# Altium PCB 447PCB.PcbDoc
Units mm, origin at the board's own origin, x right, y up, seen from the top; angles counter-clockwise.
Board outline 100 x 100 mm, 2 copper layers (Top Layer, Bottom Layer); 5 components, 25 nets, 62 pads, 0 vias.
Unrouted connection lines stored in the file: 1.
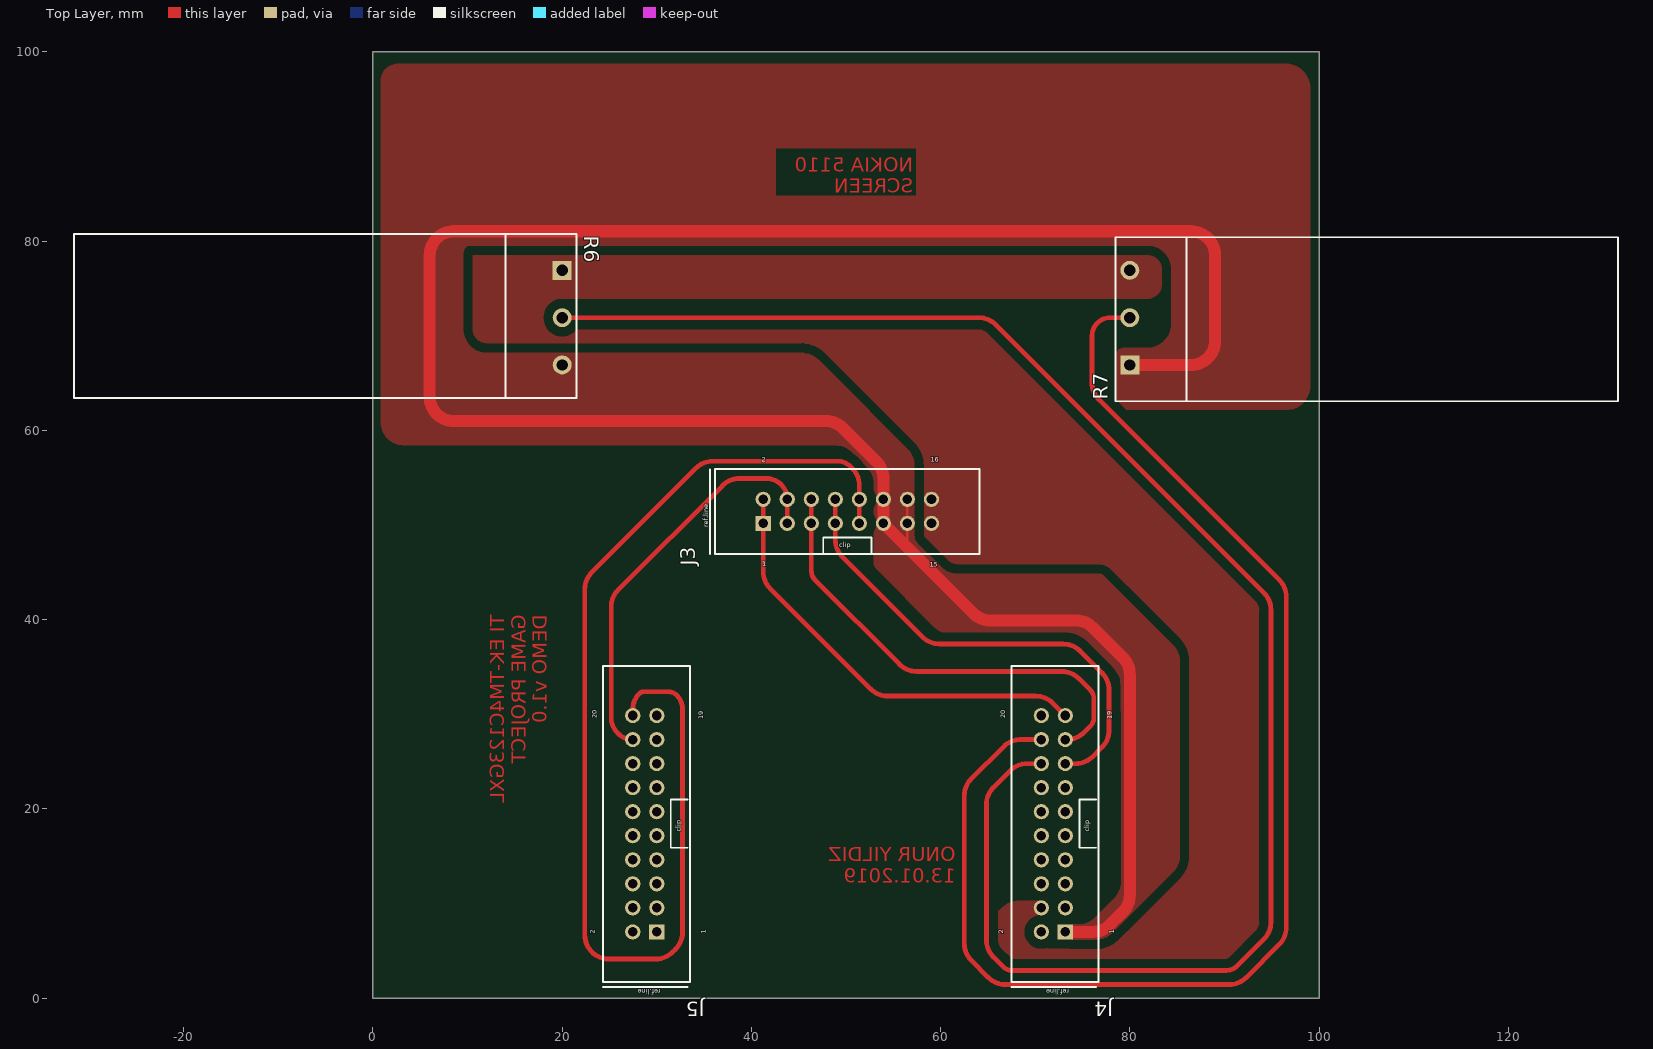
[diagram p0: Top Layer view]
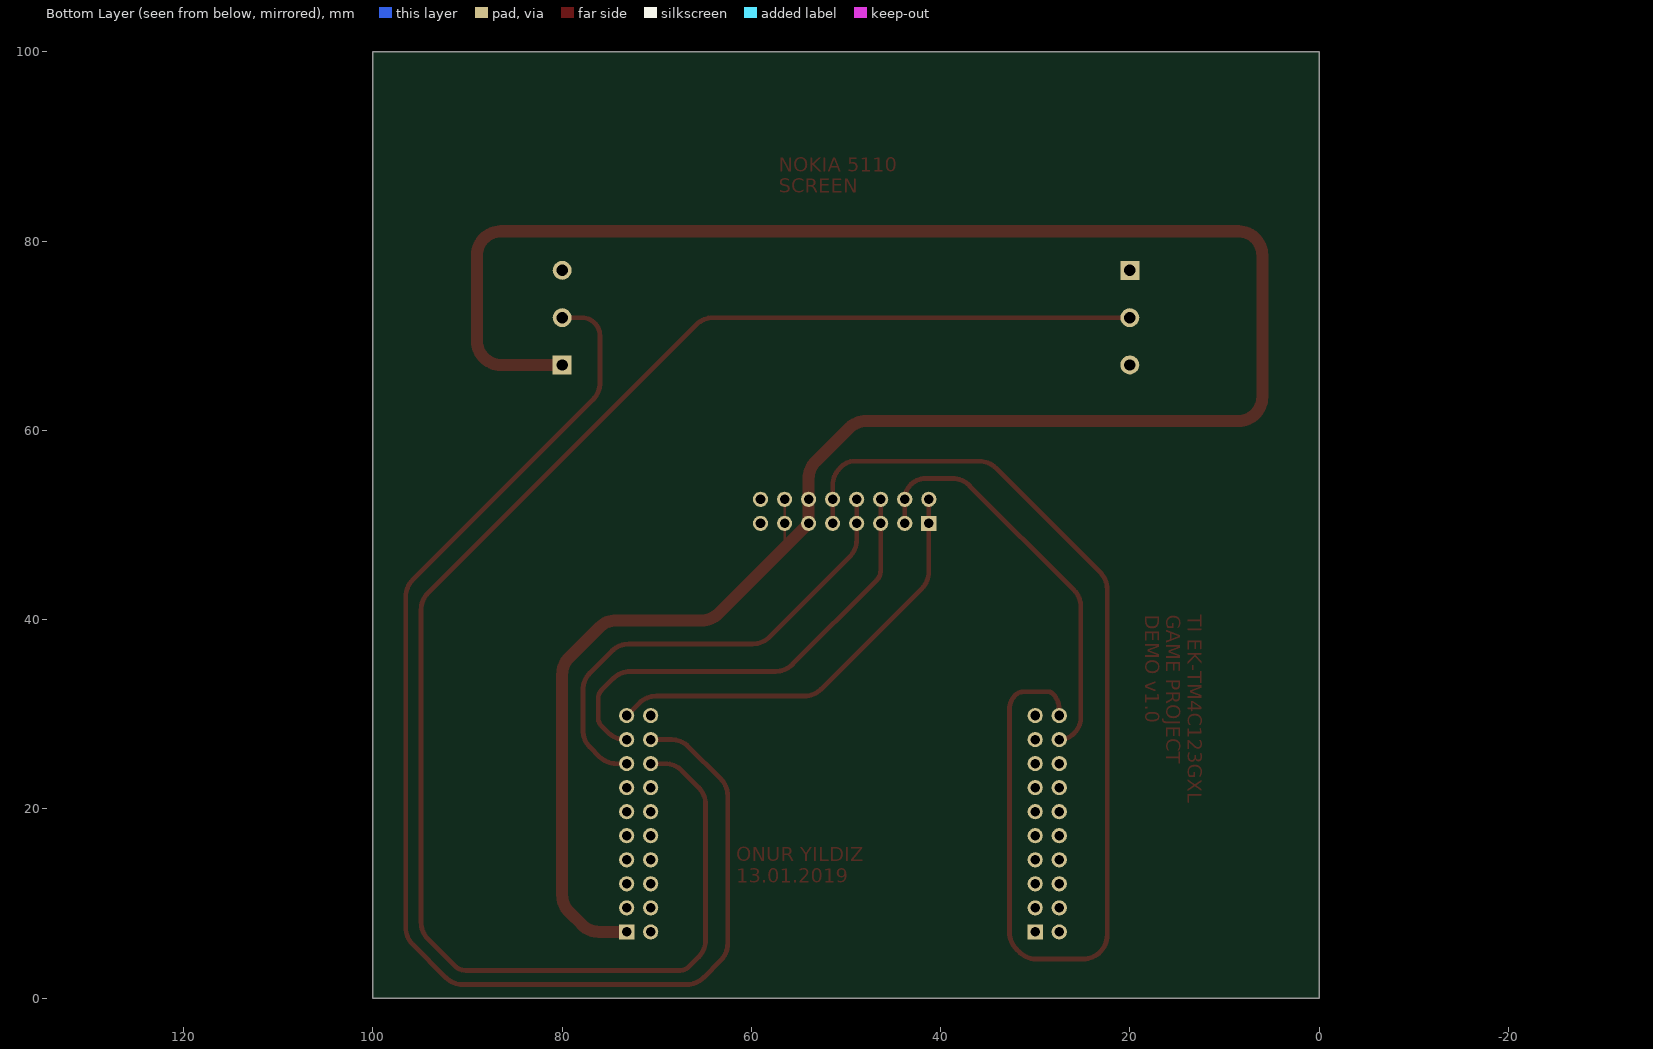
[diagram p1: Bottom Layer view, seen from below]
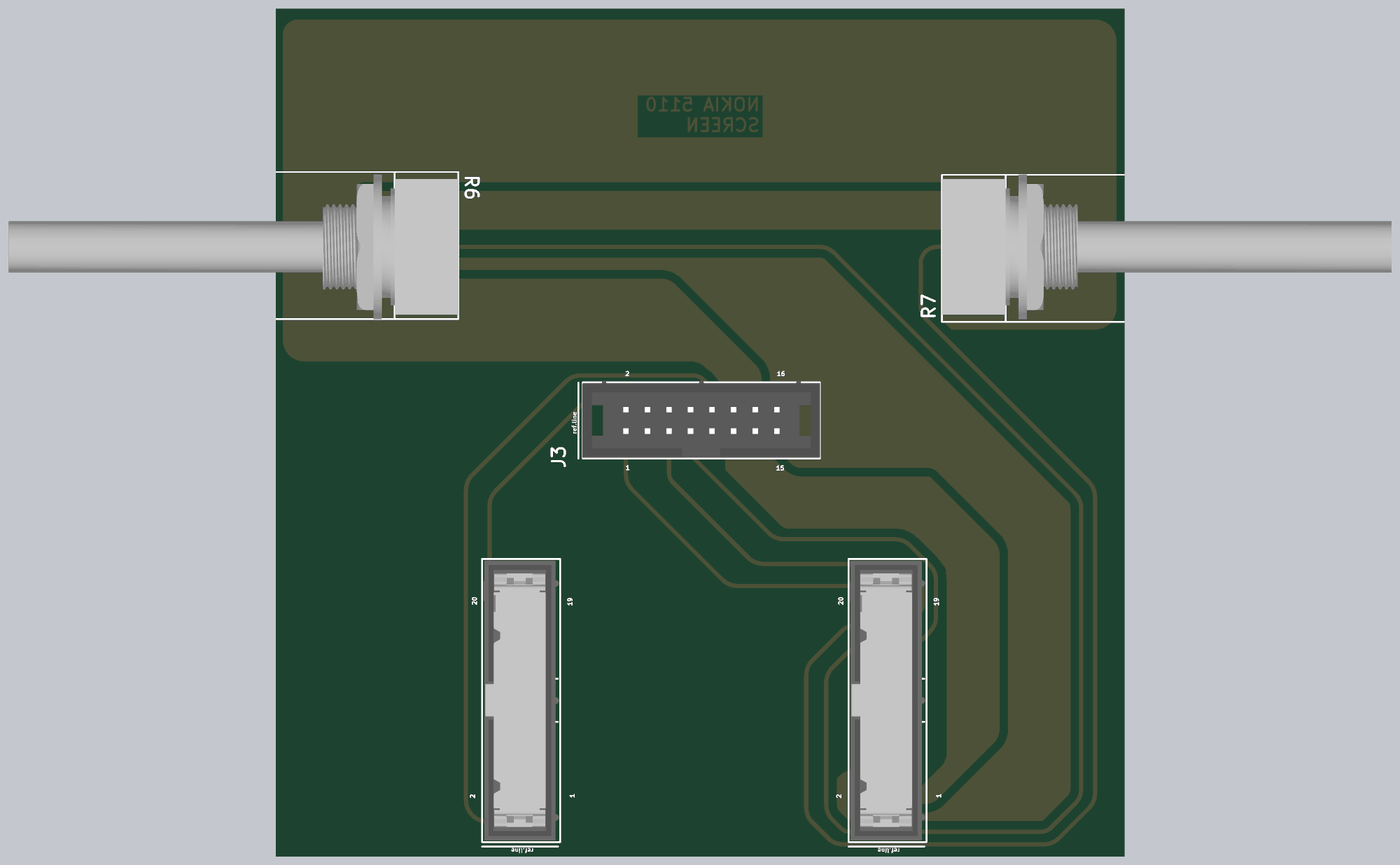
[diagram p2: 3D render of the assembled board from above, using the file's embedded part models]

## Layer stack, top to bottom
Top Solder: solder mask 0.0102, Solder Resist, Dk 3.5
Top Layer: signal copper 0.0356
Dielectric 1: dielectric 0.32, FR-4, Dk 4.8
Bottom Layer: signal copper 0.0356
Bottom Solder: solder mask 0.0102, Solder Resist, Dk 3.5

## Board outline
0,0 0,100 100,100 100,0

## Design rules (kind name [scope] priority, off if disabled: settings)
Clearance [All] p1: gap=0.254 except(1: Arc-Fill Arc-Poly Arc-Region Track-Fill Track-Poly Track-Region SMDPad-Fill SMDPad-Poly SMDPad-Region THPad-Fill THPad-Poly THPad-Region Via-Fill Via-Poly Via-Region Fill-Fill Fill-Poly Fill-Region Poly-Poly Poly-Region Region-Region)
PlaneConnect [All] p1: planeconnectstyle=Direct reliefexpansion=0.508 reliefentries=4 reliefconductorwidth=0.254 reliefairgap=0.254
PolygonConnect [All] p1: connectstyle=Direct reliefconductorwidth=0.254 reliefentries=4 polygonreliefangle="90 Angle" airgapwidth=0.254
RoomDefinition 447Schematic [InComponentClass('447Schematic')] p1: confinementstyle=ConfineIn formatcopy=TRUE lockcomponents=FALSE outline -45,-8.08 152.5,-8.08 152.5,101.92 -45,101.92
RoutingVias [All] p1: holewidth=0.711 width=1.27 viastyle="Through Hole" minholewidth=0.711 minwidth=1.27 maxholewidth=0.711 maxwidth=1.27
SolderMaskExpansion [All] p1: expansion=0.102
Width [All] p1: maxlimit=1.27 minlimit=0.254 preferedwidth=0.254 minimp=50.000000 maximp=50.000000 favimp=50.000000
29 further rules are at their usual default settings.

## Components (designator, comment, footprint, x,y, rotation, side; value= is the part's Value field where it differs from the comment)
J3 "IDC 16" IDC16 41.25,50.18 r90 top locked
J4 "IDC 20" IDC20 73.18,7 r180 top locked
J5 "IDC 20" IDC20 30,7 r180 top locked
R6 "10K-POT_CP16SH10IP06103" "POT (5mmPitch)" 20,71.92 r270 top
R7 "10K-POT_CP16SH10IP06103" "POT (5mmPitch)" 80,71.92 r90 top

## Footprints (in the part's own frame and the unit in brackets; to place one, negate y for a bottom-side part, rotate by r counter-clockwise, add the part's x,y. Pads: shape width x height; smd on the part's side, far side on the other; paste and mask are expansions set on the pad)
IDC16 [mm]
  rect 1.6x1.6 hole 1.02: 1(0,0)
  round 1.6 hole 1.02: 2(2.54,0) 3(0,-2.54) 4(2.54,-2.54) 5(0,-5.08) 6(2.54,-5.08) 7(0,-7.62) 8(2.54,-7.62) 9(0,-10.16) 10(2.54,-10.16) 11(0,-12.7) 12(2.54,-12.7) 13(0,-15.24) 14(2.54,-15.24) 15(0,-17.78) 16(2.54,-17.78)
  silkscreen extent -3.24,-22.86 5.76,5.61, body extent -3.13,-22.89 5.97,5.11, height 9.3
IDC20 [mm]
  rect 1.6x1.6 hole 1.02: 1(0,0)
  round 1.6 hole 1.02: 2(2.54,0) 3(0,-2.54) 4(2.54,-2.54) 5(0,-5.08) 6(2.54,-5.08) 7(0,-7.62) 8(2.54,-7.62) 9(0,-10.16) 10(2.54,-10.16) 11(0,-12.7) 12(2.54,-12.7) 13(0,-15.24) 14(2.54,-15.24) 15(0,-17.78) 16(2.54,-17.78) 17(0,-20.32) 18(2.54,-20.32) 19(0,-22.86) 20(2.54,-22.86)
  silkscreen extent -3.5,-28.1 5.7,5.82, body extent -3.35,-27.9 5.5,5.1, height 14.61
"POT (5mmPitch)" [mm] "POT (5mmPitch with 1.1mm pin sizes)"
  rect 2x2 hole 1.2: 1(-5,0)
  round 2 hole 1.2: 2(0,0) 3(5,0)
  silkscreen extent -8.84,-51.6 8.5,1.5, body extent -8.6,-51.5 8.6,1.5, height 21.11

## Part data
J3: library part 3020-16-0100-00, "IDC BOX HEADER .100\" 16POS"
J4 J5: library part 3020-20-0100-00, "IDC BOX HEADER .100\" 20POS"
R6 R7: library part CP16SH10IP06103, "POT 10K OHM 1/5W CARBON LINEAR"

## Nets (pads, with @x,y where several pads share a name; then routed paths per layer and width w, separated by ;. In a path a pad name is that pad's centre, name@x,y a point inside that pad or via, vN(x,y) a via of type N, cw(c..) or ccw(c..) an arc to the next point about the centre after c; other vN are vias at no path point)
3.3V: J3.11 J3.12 J3.13 J3.14 J4.1 R6.3 R7.1 | length 247.6
  Top Layer w0.254: 56.49,47.64 J3.13 J3.14
  Top Layer w1.27: J4.1 76.098,7 ccw(c76.098,9.54) 77.894,7.744 79.256,9.106 ccw(c77.46,10.902) 80,10.902 80,34.198 ccw(c77.46,34.198) 79.256,35.994 76.074,39.176 ccw(c74.278,37.38) 74.278,39.92 65.262,39.92 cw(c65.262,42.46) 63.466,40.664 56.49,47.64 J3.11 J3.12 53.95,54.918 ccw(c51.41,54.918) 53.206,56.714 49.664,60.256 ccw(c47.868,58.46) 47.868,61 8.54,61 cw(c8.54,63.54) 6,63.54 6,78.51 cw(c8.54,78.51) 8.54,81.05 86.46,81.05 cw(c86.46,78.51) 89,78.51 89,69.46 cw(c86.46,69.46) 86.46,66.92 R7.1
GND: J3.15 J3.16 J4.4 J5.2 R6.1 R7.3
NetC1_1: 
NetC1_2: 
NetC2_1: 
NetC3_2: 
NetC4_1: 
NetC4_2: 
NetD1_K: 
NetD2_A: 
NetD3_2: 
NetD6_A1: 
NetD7_A: 
NetD8_2: 
NetJ1_2: 
NetJ1_3: 
NetJ1_5: 
NetJ1_6: 
NetJ3_1: J3.1 J3.2 J4.19 | length 46.2
  Top Layer w0.5: J3.2 J3.1 41.25,45.077 ccw(c43.79,45.077) 41.994,43.281 52.611,32.664 ccw(c54.407,34.46) 54.407,31.92 70.068,31.92 cw(c70.068,29.38) 71.864,31.176 J4.19
NetJ3_3: J3.3 J3.4 J5.18 | length 43.7
  Top Layer w0.5: J5.18 cw(c27.46,29.505) 25.915,27.96 25.875,28 cw(c27.565,29.69) 25.177,29.603 cw(c27.565,29.69) 25.175,29.69 25.175,41.348 cw(c27.715,41.348) 25.919,43.144 36.951,54.176 cw(c38.747,52.38) 38.747,54.92 41.59,54.92 cw(c41.59,52.72) J3.4 J3.3
NetJ3_5: J3.5 J3.6 J4.17 | length 49.5
  Top Layer w0.5: J3.6 J3.5 46.33,45.224 ccw(c47.849,45.224) 46.775,44.15 55.656,35.269 ccw(c57.452,37.065) 56.092,34.92 ccw(c57.452,37.065) 57.452,34.525 72.798,34.525 cw(c72.798,31.985) 74.594,33.781 75.846,32.529 cw(c74.993,31.675) 76.2,31.675 76.2,29.611 cw(c75.014,29.611) 76,28.952 cw(c75.014,29.611) 75.853,28.773 75.144,28.064 cw(c73.348,29.86) 73.348,27.32 J4.17
NetJ3_7: J3.7 J3.8 J4.15 | length 51.3
  Top Layer w0.5: J3.8 J3.7 48.87,48.432 ccw(c51.41,48.432) 49.614,46.636 58.081,38.169 ccw(c59.877,39.965) 58.371,37.92 ccw(c59.877,39.965) 59.877,37.425 72.948,37.425 cw(c72.948,34.885) 74.744,36.681 77.056,34.369 cw(c75.26,32.573) 77.8,32.573 77.8,28.302 cw(c75.26,28.302) 77.056,26.506 76.074,25.524 cw(c74.278,27.32) 74.278,24.78 J4.15
NetJ3_9: J3.9 J3.10 J5.20 | length 122.2
  Top Layer w0.5: J5.20 27.46,30.509 cw(c29.816,30.509) 28.15,32.175 cw(c28.633,31.692) 28.633,32.375 31.255,32.375 cw(c31.255,31.18) 32.1,32.025 cw(c30.591,30.516) 32.725,30.516 32.725,6.977 cw(c30.185,6.977) 31.981,5.181 31.625,4.825 cw(c29.935,6.515) 29.935,4.125 24.94,4.125 cw(c24.94,6.665) 22.4,6.665 22.4,43.223 cw(c24.94,43.223) 23.144,45.019 34.131,56.006 cw(c35.927,54.21) 35.927,56.75 49.122,56.75 cw(c49.122,54.872) 50.45,56.2 50.666,55.984 cw(c48.87,54.188) 51.41,54.188 J3.10 J3.9
NetJ4_16: J4.16 R6.2 | length 177.8
  Top Layer w0.5: R6.2 64.028,71.92 cw(c64.028,69.38) 65.824,71.176 94.169,42.831 cw(c92.373,41.035) 94.913,41.035 94.913,8.015 cw(c92.373,8.015) 94.169,6.219 91.375,3.425 cw(c90.156,4.644) 90.156,2.92 67.552,2.92 cw(c67.552,4.252) 66.61,3.31 65.594,4.326 cw(c67.39,6.122) 65,5.262 cw(c67.39,6.122) 64.85,6.122 64.85,20.498 cw(c67.39,20.498) 65,21.358 cw(c67.39,20.498) 65.594,22.294 67.336,24.036 cw(c69.132,22.24) 69.132,24.78 J4.16
NetJ4_18: J4.18 R7.2 | length 141.7
  Top Layer w0.5: J4.18 68.452,27.32 ccw(c68.452,24.78) 66.656,26.576 63.244,23.164 ccw(c65.04,21.368) 63,22.881 ccw(c65.04,21.368) 62.5,21.368 62.5,5.777 ccw(c65.04,5.777) 63,4.264 ccw(c65.04,5.777) 63.244,3.981 65.056,2.169 ccw(c66.852,3.965) 66.852,1.425 90.498,1.425 ccw(c90.498,3.965) 92.294,2.169 95.794,5.669 ccw(c93.998,7.465) 96.538,7.465 96.538,42.41 ccw(c93.998,42.41) 95.794,44.206 76.744,63.256 cw(c78.54,65.052) 76,65.052 76,70 cw(c77.92,70) 77.92,71.92 R7.2
pads on no net: J4.2 J4.3 J4.5 J4.6 J4.7 J4.8 J4.9 J4.10 J4.11 J4.12 J4.13 J4.14 J4.20 J5.1 J5.3 J5.4 J5.5 J5.6 J5.7 J5.8 J5.9 J5.10 J5.11 J5.12 J5.13 J5.14 J5.15 J5.16 J5.17 J5.19

## Polygon pours and split planes (outlines as drawn)
GND on Top Layer "GND-Polygon1" (solid, remove dead copper, pour order 1): 2.6,81.4 2.6,66.502 ccw(c5.14,66.502) 3.344,64.706 3.375,64.675 3.856,64.194 ccw(c5.652,65.99) 5.652,63.45 34.55,63.45 48.673,63.45 cw(c48.673,60.91) 50.469,62.706 54.85,58.325 56.156,57.019 cw(c54.36,55.223) 56.9,55.223 56.9,45 68.973,45 cw(c68.973,42.46) 70.769,44.256 77.425,37.6 79.131,35.894 cw(c77.335,34.098) 79.875,34.098 79.875,11.35 67.465,11.35 ccw(c67.465,8.81) 64.925,8.81 64.925,8.125 64.925,5.44 ccw(c67.465,5.44) 67.465,2.9 72.15,2.9 89.035,2.9 96.01,2.9 ccw(c96.01,5.44) 98.55,5.44 98.55,70.625 98.55,79.16 ccw(c96.01,79.16) 96.01,81.7 94.65,81.7
3.3V on Top Layer "3.3V-Polygon2" (solid, remove dead copper, pour order 0): 73.118,6.938 cw(c73.118,6.168) 73.888,6.168 76.356,6.163 ccw(c76.361,8.703) 78.157,6.907 79.888,8.638 84.544,13.294 ccw(c82.748,15.09) 85.288,15.09 85.288,25.188 85.288,35.561 ccw(c82.748,35.561) 84.544,37.357 77.263,44.638 ccw(c76.78,44.155) 76.78,44.838 68.613,44.838 61.862,44.838 cw(c61.862,47.378) 60.066,45.582 57.606,48.042 cw(c58.495,48.931) 57.238,48.931 57.238,53.563 57.238,56.261 ccw(c54.698,56.261) 56.494,58.057 48.588,65.963 47.107,67.444 ccw(c45.311,65.648) 45.311,68.188 17.288,68.188 12.078,68.188 cw(c12.078,70.728) 9.538,70.728 9.538,71.988 9.538,78.713 cw(c10.363,78.713) 10.363,79.538 81.848,79.538 cw(c81.848,76.998) 84.388,76.998 84.388,75.663 84.388,71.278 cw(c81.848,71.278) 81.848,68.738 81.063,68.738 79.338,68.738 ccw(c79.338,67.913) 78.513,67.913 78.513,63.263 ccw(c79.613,63.263) 79.613,62.163 96.523,62.163 ccw(c96.523,64.703) 99.063,64.703 99.063,65.413 99.063,96.198 ccw(c96.523,96.198) 96.523,98.738 89.438,98.738 2.613,98.738 ccw(c2.613,96.938) 0.813,96.938 0.813,60.953 ccw(c3.353,60.953) 3.353,58.413 46.788,58.413 48.861,58.413 cw(c48.861,55.873) 50.657,57.669 52.263,56.063 cw(c50.633,54.433) 52.938,54.433 52.938,45.888 ccw(c53.602,45.888) 53.132,45.418 59.388,39.163 ccw(c60.716,40.491) 60.716,38.613 72.963,38.613 73.311,38.613 cw(c73.311,36.073) 75.107,37.869 78.713,34.263 cw(c78.049,33.599) 78.988,33.599 78.988,21.638 78.988,13.86 cw(c76.448,13.86) 78.244,12.064

## Other copper
Top Layer:
  pour cut-out: 73.237,7.788 74.025,7.788 74.65,7.788 ccw(c74.556,10.218) 76.341,8.566 78.331,10.556 ccw(c76.535,12.352) 79.075,12.352 79.075,30.325 76.975,24.425
  pour cut-out: 70.64,10.271 71.198,10.829 cw(c71.55,10.477) 71.55,10.975 cw(c71.55,10.734) 71.721,10.904 71.9,10.725 71.9,8.687 cw(c71.388,8.687) 71.75,8.325 ccw(c71.69,8.265) 71.69,8.35 70.625,8.35
  pour cut-out: 70.287,10.306 68.282,10.306 ccw(c68.282,7.766) 66.486,9.562 66.111,9.187 66.098,8.66 65.802,9.496 cw(c66.531,10.225) 65.5,10.225 65.5,10.298 cw(c68.04,10.298) 66.244,12.094 66.4,12.25 cw(c66.943,11.707) 66.943,12.475 68.6,12.475
  pour cut-out: 71.975,6.825 71.975,8.113 cw(c72.487,8.113) 72.125,8.475 cw(c72.306,8.294) 72.306,8.55 73.575,8.55 73.575,8.469 cw(c71.356,8.469) 72.925,6.9
  pour cut-out: 20,73.93 81.88,73.93 ccw(c81.88,75.425) 83.375,75.425 cw(c83.375,74.875) 83.925,74.875 83.925,70.65 cw(c82.8,70.65) 82.8,69.525 80.325,69.525 ccw(c80.325,67.075) 77.875,67.075 77.875,63.9 cw(c76.325,63.9) 76.325,62.35 cw(c76.325,64.402) 74.874,62.951 66.094,71.731 ccw(c64.298,69.935) 64.298,72.475 21.775,72.475 cw(c21.775,74.95) 20.025,73.2
  text "NOKIA 5110 / SCREEN" at 57.125,85.1 h1.5
  text "TI EK-TM4C123GXL / GAME PROJECT / DEMO v1.0" at 18.375,40.525 h1.5 r90
  text "ONUR YILDIZ / 13.01.2019" at 61.575,12.2 h1.5

## Silkscreen, mask and mechanical layers (free items; w line width, h text height)
Mechanical 1:
  the board outline again, w0.254

## Text inside footprints (layer, text, board x,y; h text height)
J3: Top Overlay "ref.line" at 35.415,49.775 h0.5 r90; Top Overlay "clip" at 49.265,47.625 h0.5; Top Overlay "1" at 41.125,45.63 h0.5; Top Overlay "2" at 41.075,56.705 h0.5; Top Overlay "15" at 58.85,45.58 h0.5; Top Overlay "16" at 58.95,56.705 h0.5
J4: Top Overlay "clip" at 75.735,17.555 h0.5 r90; Top Overlay "ref.line" at 73.605,0.95 h0.5 r180; Top Overlay "1" at 78.355,6.825 h0.5 r90; Top Overlay "2" at 66.605,6.775 h0.5 r90; Top Overlay "19" at 78.08,29.475 h0.5 r90; Top Overlay "20" at 66.83,29.575 h0.5 r90
J5: Top Overlay "clip" at 32.555,17.555 h0.5 r90; Top Overlay "ref.line" at 30.425,0.95 h0.5 r180; Top Overlay "1" at 35.175,6.825 h0.5 r90; Top Overlay "2" at 23.425,6.775 h0.5 r90; Top Overlay "19" at 34.9,29.475 h0.5 r90; Top Overlay "20" at 23.65,29.575 h0.5 r90